# Altium PCB PCB2_brd2.PcbDoc
Units mil, origin at the board's own origin, x right, y up, seen from the top; angles counter-clockwise.
Board outline 3900 x 3900 mil, 2 copper layers (Top Layer, Bottom Layer); 48 components, 32 nets, 152 pads, 28 vias.
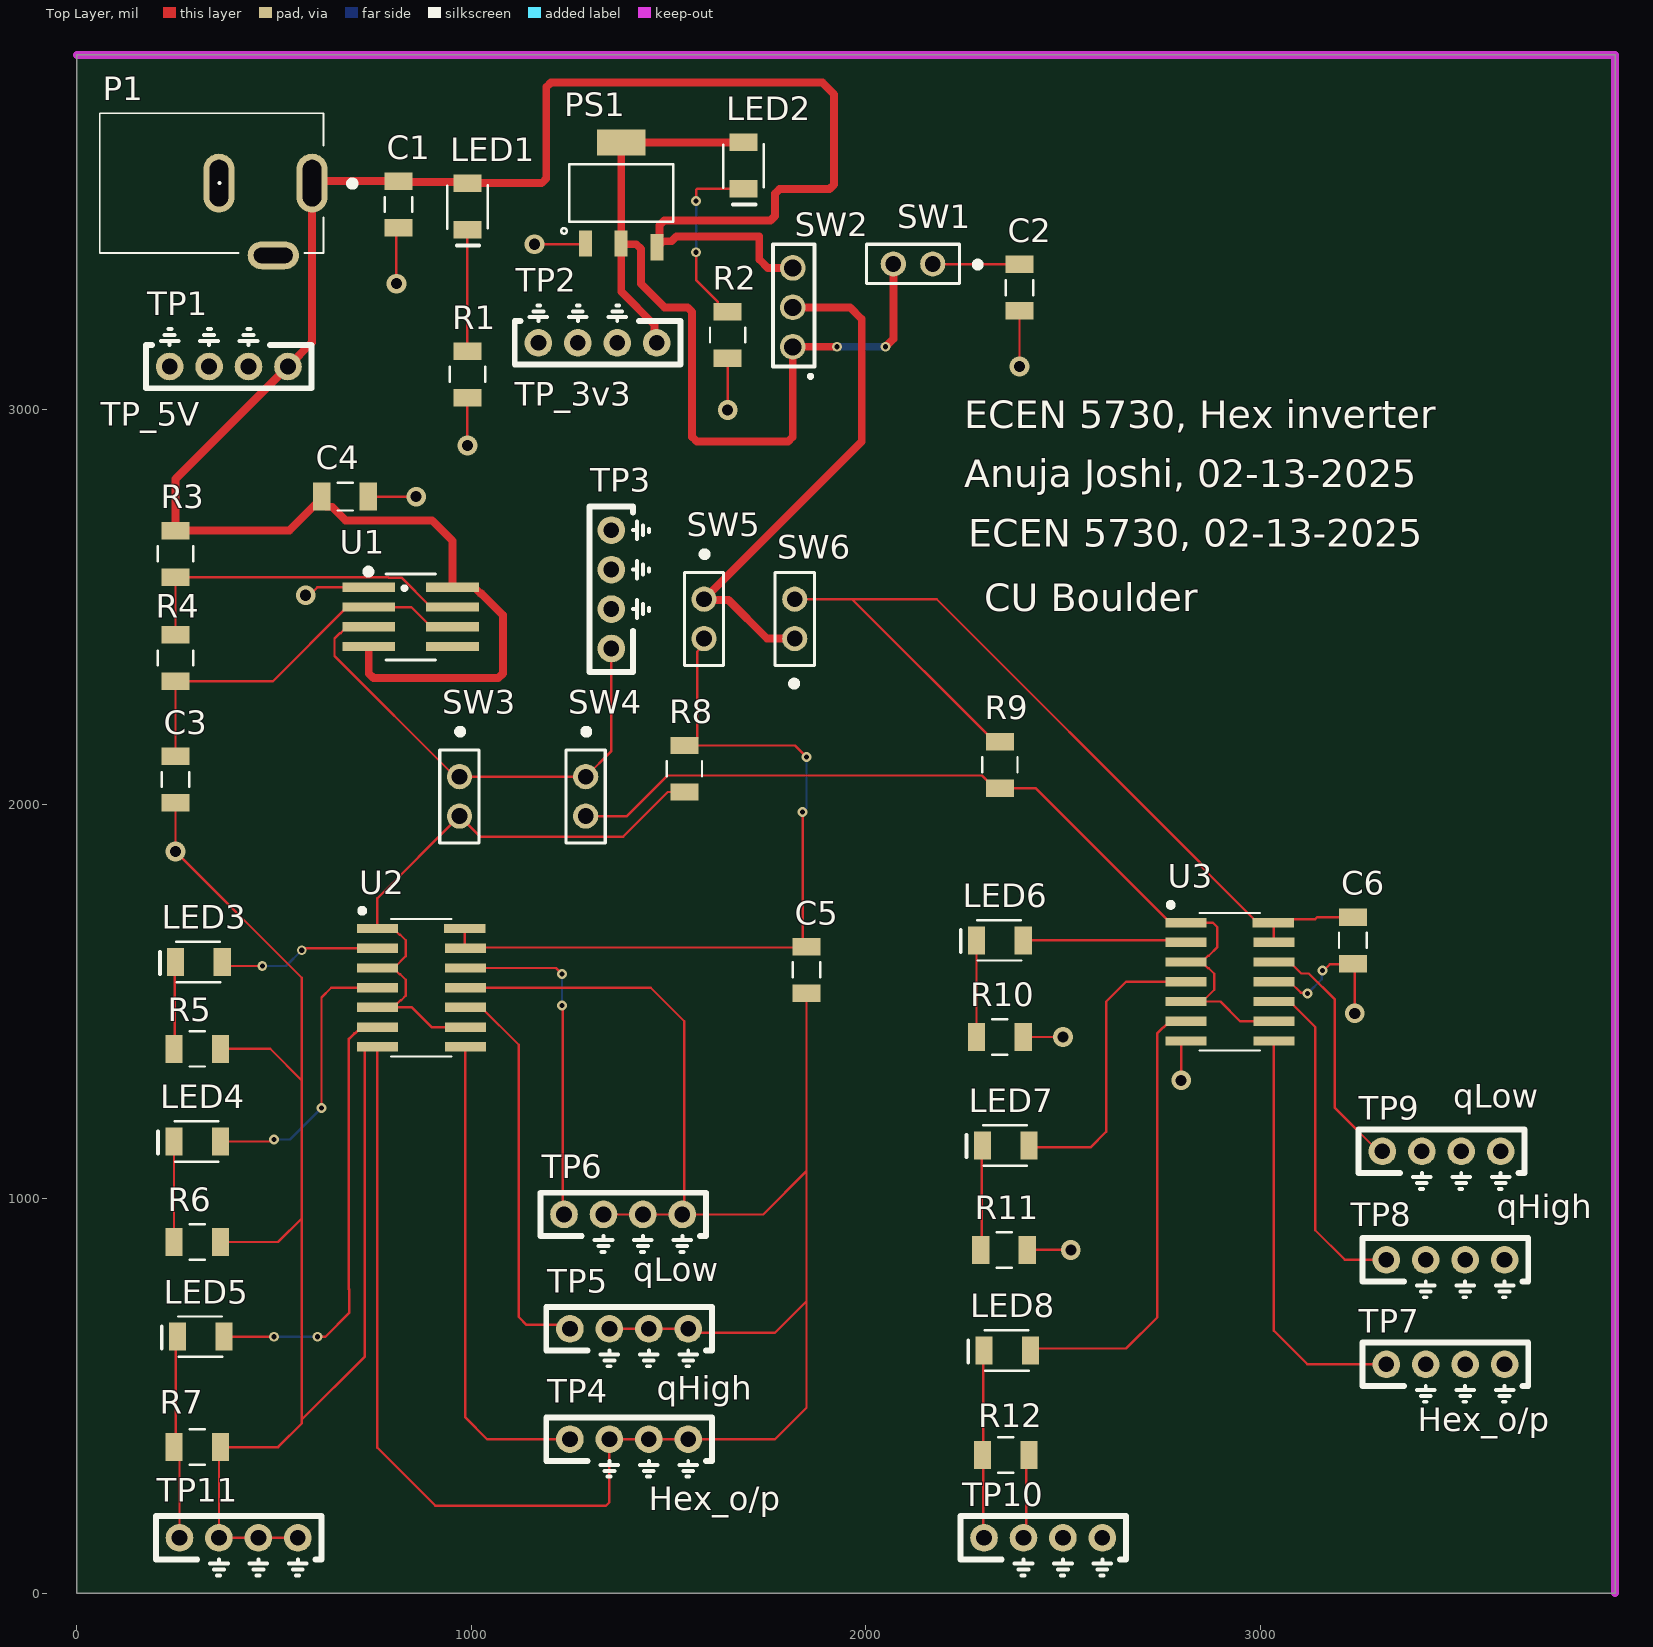
[diagram p0: Top Layer view]
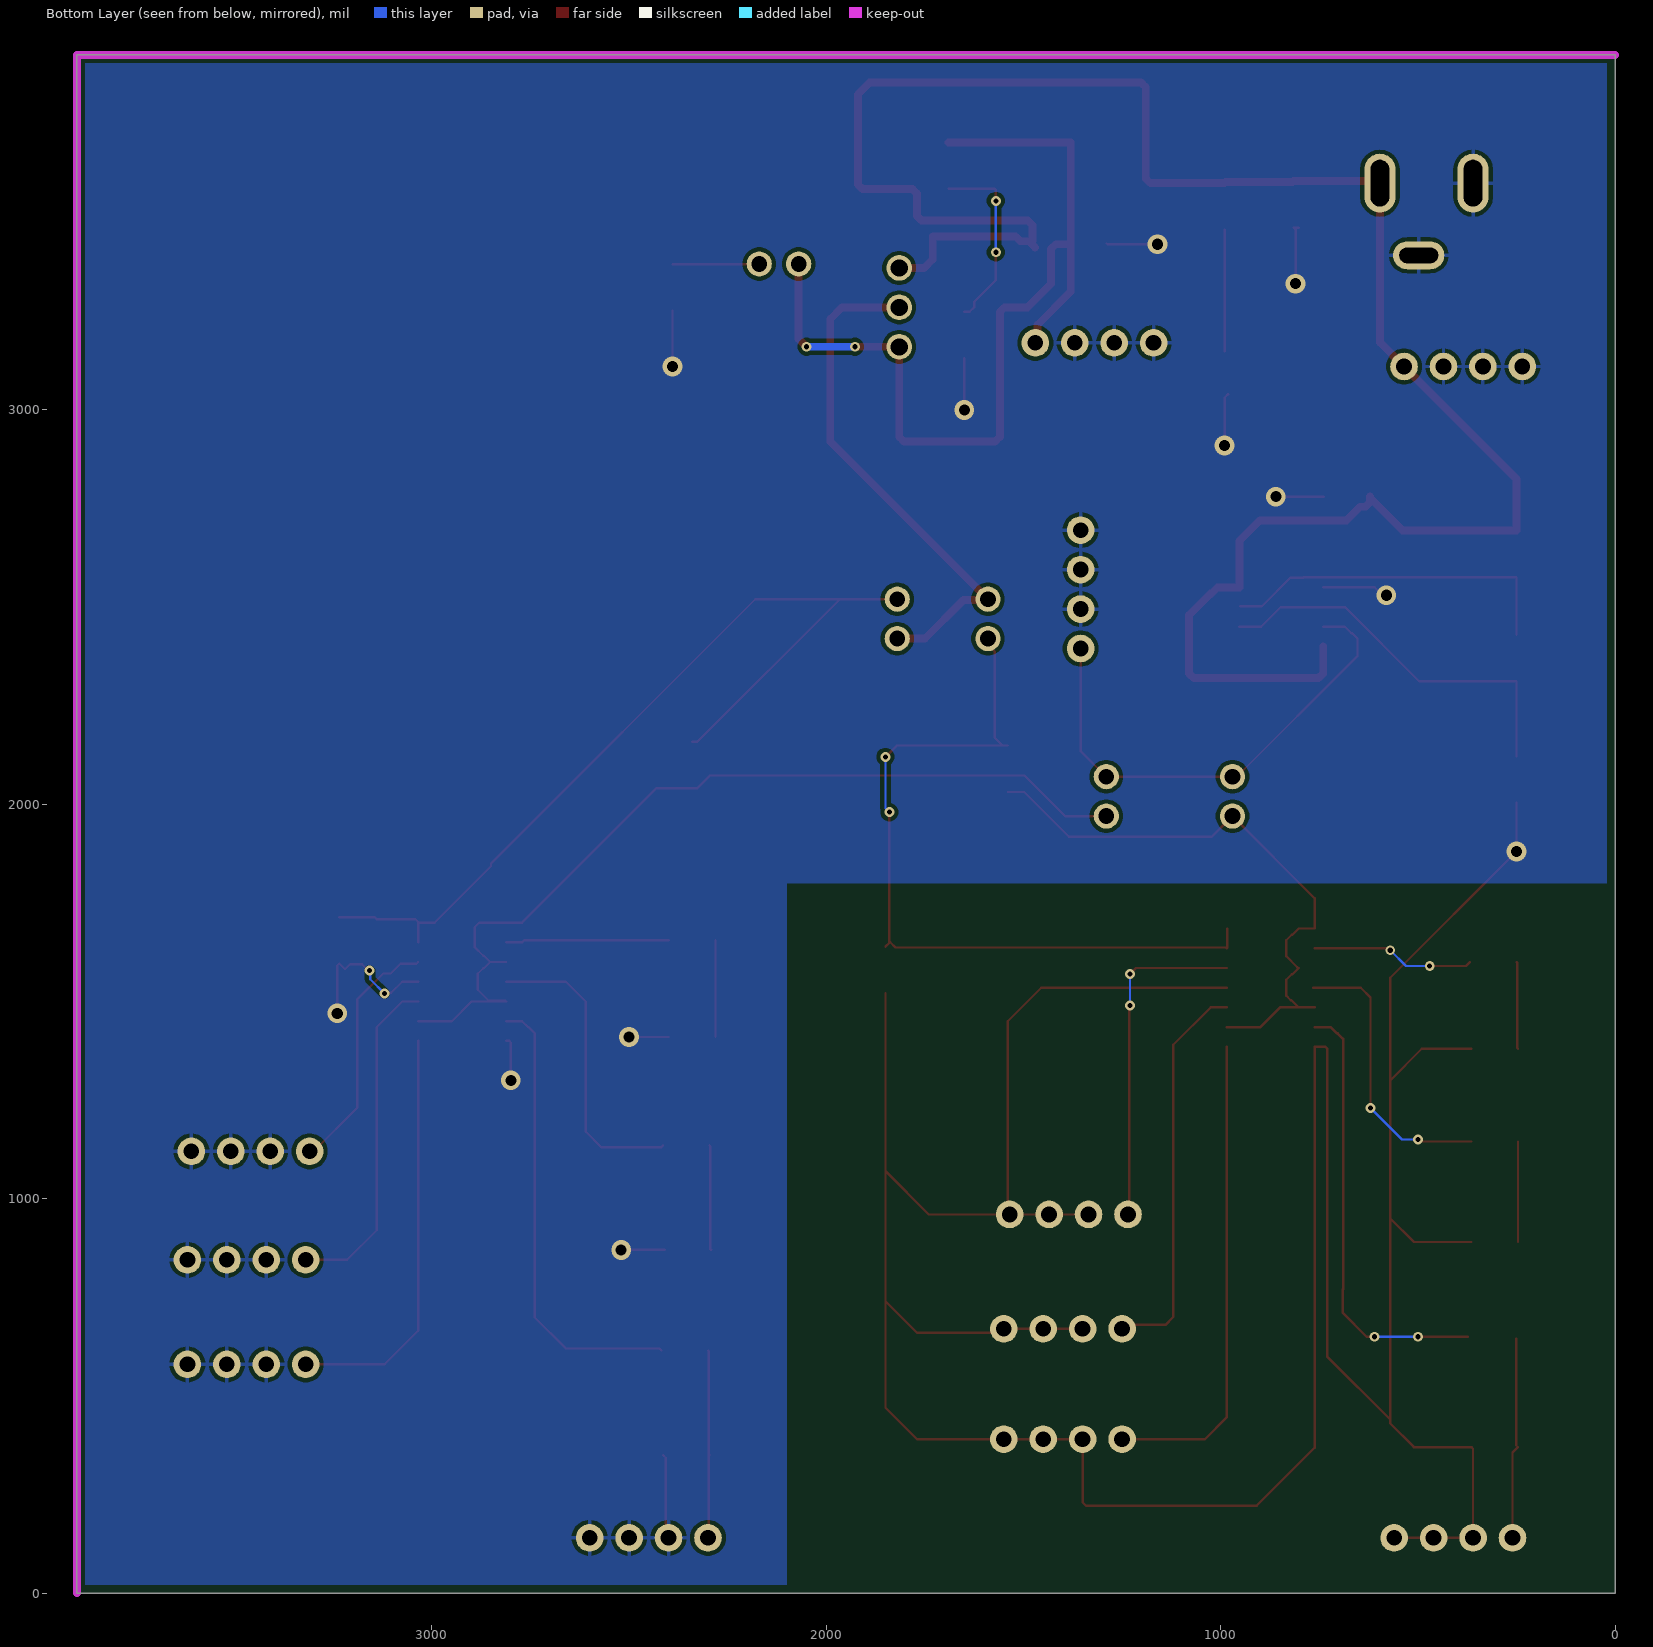
[diagram p1: Bottom Layer view, seen from below]
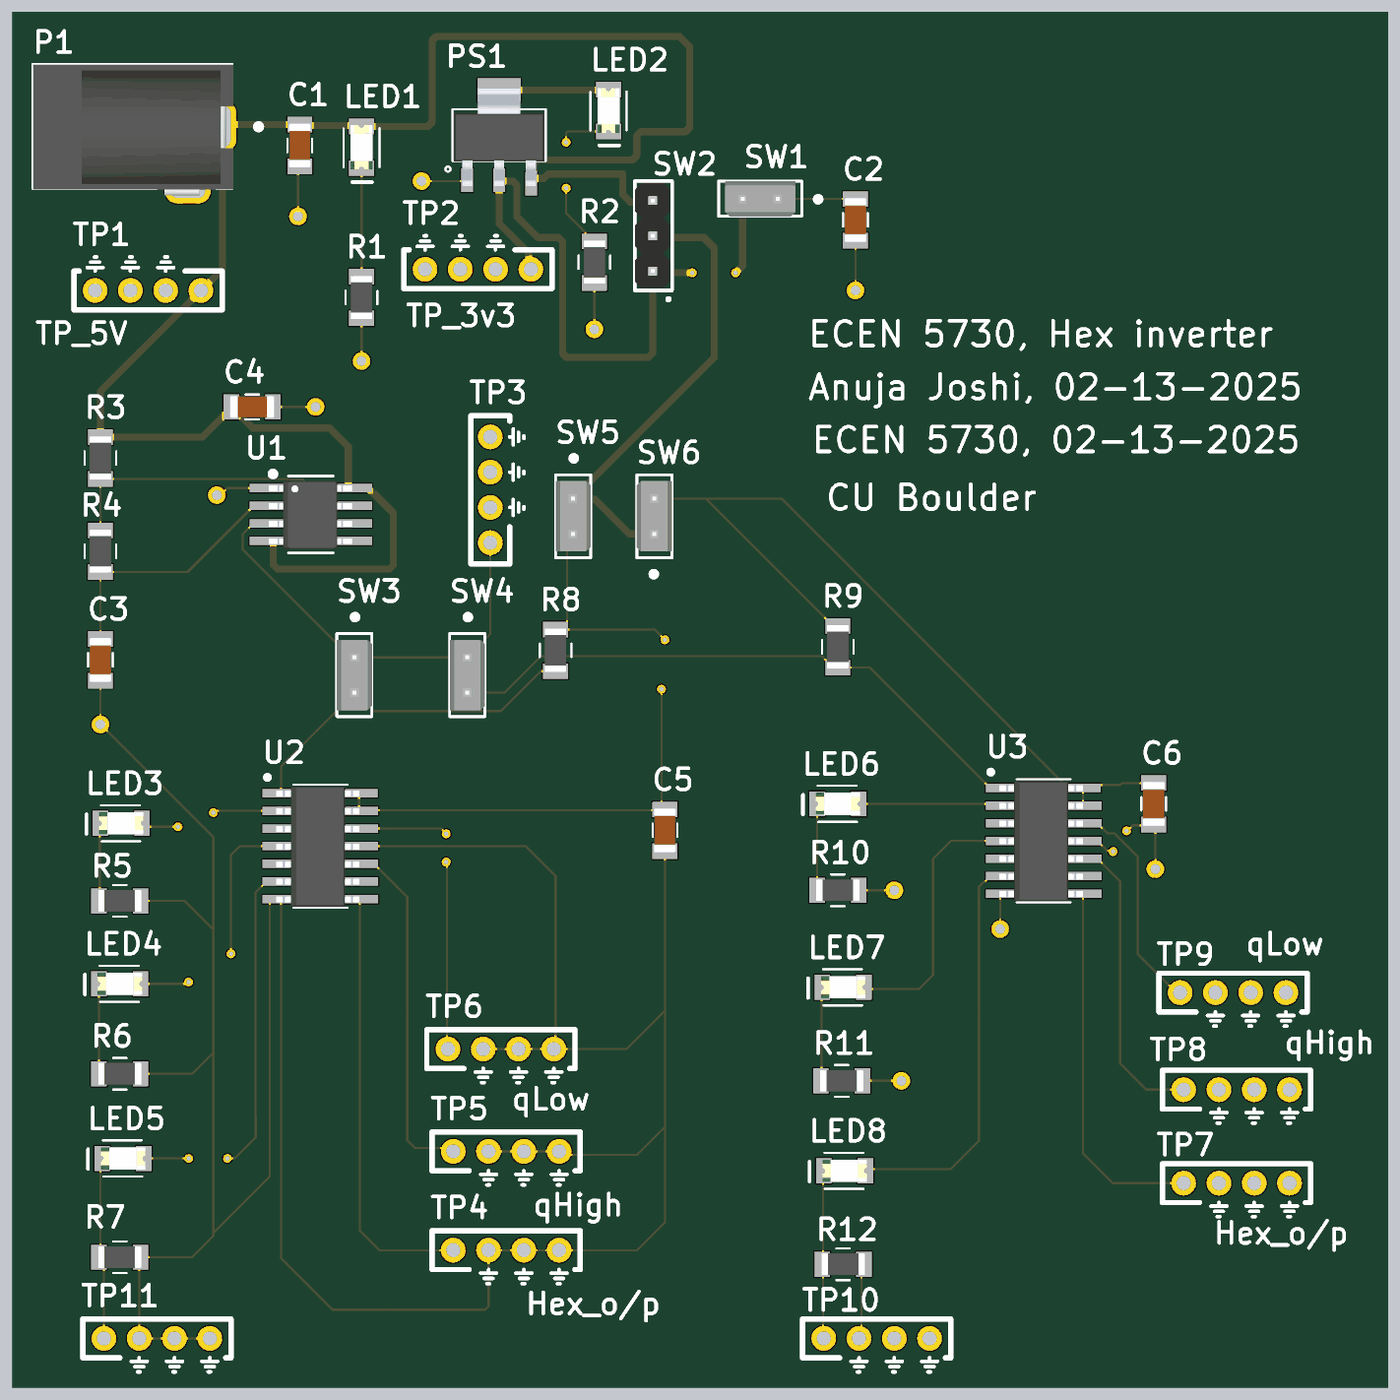
[diagram p2: 3D render of the assembled board from above, using the file's embedded part models]

## Layer stack, top to bottom
Top Solder: solder mask 0.4, Solder Resist, Dk 3.5
Top Layer: signal copper 1.4
Dielectric 1: dielectric 12.6, FR-4, Dk 4.8
Bottom Layer: signal copper 1.4
Bottom Solder: solder mask 0.4, Solder Resist, Dk 3.5

## Board outline
0,0 3900,0 3900,3900 0,3900

## Design rules (kind name [scope] priority, off if disabled: settings)
BoardOutlineClearance [All] p1: gap=10 ignorepadtopadclearanceinfootprint=FALSE except(0: Arc-SplitContinuation Track-SplitContinuation SMDPad-SplitContinuation THPad-SplitContinuation Via-SplitContinuation Fill-SplitContinuation Poly-SplitContinuation Region-SplitContinuation Text-SplitContinuation)
Clearance [All] p1: gap=10 ignorepadtopadclearanceinfootprint=FALSE
PlaneClearance [All] p1: clearance=10
PlaneConnect [All] p1: planeconnectstyle=Direct reliefexpansion=20 reliefentries=4 reliefconductorwidth=10 reliefairgap=10
PolygonConnect [All] p1: thpad.connectstyle=Relief thpad.reliefconductorwidth=10 thpad.reliefentries=4 thpad.polygonreliefangle="90 Angle" thpad.airgapwidth=10 smdpad.connectstyle=Direct smdpad.reliefconductorwidth=10 smdpad.reliefentries=4 smdpad.polygonreliefangle="90 Angle" smdpad.airgapwidth=10 via.connectstyle=Direct via.reliefconductorwidth=10 via.reliefentries=4 via.polygonreliefangle="90 Angle" via.airgapwidth=10
RoutingVias [All] p1: holewidth=13 width=25 viastyle="Through Hole" minholewidth=13 minwidth=25 maxholewidth=60 maxwidth=80
SolderMaskExpansion [All] p1: expansion=4 istentingtop=FALSE
SupplyNets "Schematic Supply Nets_1" [InNet('5V')] p1: voltage=0.000
SupplyNets "Schematic Supply Nets_3" [InNet('GND')] p2: voltage=0.000
SupplyNets "Schematic Supply Nets" [InNet('3.3V')] p3: voltage=0.000
UnRoutedNet [All] p1: checkbadconnections=TRUE
Width "Schematic Width Constraint_1" [InNet('3.3V')] p1: maxlimit=100 minlimit=20 preferedwidth=20 minimp=50.000000 maximp=50.000000 favimp=50.000000
Width "Schematic Width Constraint_4" [InNet('NetSW2_2')] p2: maxlimit=100 minlimit=20 preferedwidth=20 minimp=50.000000 maximp=50.000000 favimp=50.000000
Width "Schematic Width Constraint" [InNet('5V')] p3: maxlimit=100 minlimit=20 preferedwidth=20 minimp=50.000000 maximp=50.000000 favimp=50.000000
Width [All] p4: maxlimit=6 minlimit=6 preferedwidth=6 minimp=50.000000 maximp=50.000000 favimp=50.000000
27 further rules are at their usual default settings.

## Components (designator, comment, footprint, x,y, rotation, side; value= is the part's Value field where it differs from the comment)
C1 "22uF" 1206_Passive_Capacitor 815,3521 r90 top
C2 "22uF" 1206_Passive_Capacitor 2390,3310 r90 top
C3 "1uF" 1206_Passive_Capacitor 250,2063 r90 top
C4 "22uF" 1206_Passive_Capacitor 680,2780 r0 top
C5 "22uF" 1206_Passive_Capacitor 1850,1580 r270 top
C6 "22uF" 1206_Passive_Capacitor 3235,1655 r270 top
LED1 "Green" LED_1206 990,3516 r270 top
LED2 "Blue" LED_1206 1690,3620 r270 top
LED3 "Green" LED_1206 309,1600 r180 top
LED4 "Green" LED_1206 305,1145 r180 top
LED5 "Green" LED_1206 314,650 r180 top
LED6 "Green" LED_1206 2340,1655 r180 top
LED7 "Green" LED_1206 2355,1135 r180 top
LED8 "Green" LED_1206 2359,615 r180 top
P1 "Power Jack" Power_Jack 596.22,3575 r180 top value="CONN PWR JACK 2X5.5MM SOLDER"
PS1 "AMS1117-3.3" LDO 1380,3550 r0 top value="IC REG LINEAR 3.3V 800MA SOT223"
R1 "1k" 1206_Passive_Resitor 990,3090 r90 top value="1K Ohm"
R2 "1k" 1206_Passive_Resitor 1650,3190 r90 top value="1K Ohm"
R3 "1k" 1206_Passive_Resitor 250,2635 r90 top value="1K Ohm"
R4 "1k" 1206_Passive_Resitor 250,2371 r90 top value="1K Ohm"
R5 "47 Ohms" 1206_Passive_Resitor 305,1380 r0 top value=47Ohm
R6 "47 Ohms" 1206_Passive_Resitor 305,890 r0 top value=47Ohm
R7 "47 Ohms" 1206_Passive_Resitor 305,370 r0 top value=47Ohm
R8 "10k" 1206_Passive_Resitor 1540,2090 r90 top value=10KOhm
R9 "10k" 1206_Passive_Resitor 2340,2100 r90 top value=10KOhm
R10 "47 Ohms" 1206_Passive_Resitor 2340,1410 r0 top value=47Ohm
R11 "47 Ohms" 1206_Passive_Resitor 2351,870 r0 top value=47Ohm
R12 "47 Ohms" 1206_Passive_Resitor 2355,350 r0 top value=47Ohm
SW1 "SW_2Pin_100mil_Switch" 2Pin-Header-Conn 2170,3370 r180 top
SW2 "PREC003SAAN-RC" 3_PIN_100mil 1815,3160 r90 top value="CONN HEADER VERT 3POS 2.54MM"
SW3 "SW_2Pin_100mil_Switch" 2Pin-Header-Conn 970,2070 r270 top
SW4 "SW_2Pin_100mil_Switch" 2Pin-Header-Conn 1290,2070 r270 top
SW5 "SW_2Pin_100mil_Switch" 2Pin-Header-Conn 1590,2520 r270 top
SW6 "SW_2Pin_100mil_Switch" 2Pin-Header-Conn 1820,2420 r90 top
TP1 "TP_5V" TP10x_Probe 385,3110 r180 top
TP2 "10x Probe TP" TP10x_Probe 1320,3170 r180 top
TP3 "10x Probe TP" TP10x_Probe 1355,2545 r90 top
TP4 "10x Probe TP" TP10x_Probe 1400,390 r0 top
TP5 "10x Probe TP" TP10x_Probe 1400,670 r0 top
TP6 "10x Probe TP" TP10x_Probe 1385,960 r0 top
TP7 "10x Probe TP" TP10x_Probe 3470,580 r0 top
TP8 "10x Probe TP" TP10x_Probe 3470,845 r0 top
TP9 "10x Probe TP" TP10x_Probe 3460,1120 r0 top
TP10 "10x Probe TP" TP10x_Probe 2450,140 r0 top
TP11 "10x Probe TP" TP10x_Probe 410,140 r0 top
U1 "LMC555CMX/NOPB" TS555IDTTR 846.3,2475 r0 top
U2 "SN74AHC14DR" HEX_74AC14 873.35,1535 r0 top
U3 "SN74AHC14DR" HEX_74AC14 2923.35,1550 r0 top

## Footprints (in the part's own frame and the unit in brackets; to place one, negate y for a bottom-side part, rotate by r counter-clockwise, add the part's x,y. Pads: shape width x height; smd on the part's side, far side on the other; paste and mask are expansions set on the pad)
2Pin-Header-Conn [mm]
  round 1.62 hole 1.02: 1(0,0) 2(2.54,0)
  silkscreen extent -3.03,-1.27 4.26,1.26, body extent -1.27,-1.27 3.81,1.27, height 8.13
3_PIN_100mil [mm]
  round 1.65 hole 1.1: 1(0,0) 2(2.54,0) 3(5.08,0)
  silkscreen extent -2,-1.4 6.6,1.27, body extent -1.14,-1.27 6.48,1.27, height 8.38
1206_Passive_Capacitor [mil]
  rect 44x71 smd: 1(-59,0) 2(59,0)
  silkscreen extent -19,-35 19,35, body extent -63,-31 63,32, height 50
1206_Passive_Resitor [mil]
  rect 44x71 smd: 1(-59,0) 2(59,0)
  silkscreen extent -19,-45 19,45, body extent -61,-31 61,31, height 26
HEX_74AC14 [mm]
  rect 2.65x0.6 smd: 1(-2.836,3.81) 2(-2.836,2.54) 3(-2.836,1.27) 4(-2.836,0) 5(-2.836,-1.27) 6(-2.836,-2.54) 7(-2.836,-3.81) 8(2.836,-3.81) 9(2.836,-2.54) 10(2.836,-1.27) 11(2.836,0) 12(2.836,1.27) 13(2.836,2.54) 14(2.794,3.81)
  silkscreen extent -3.94,-4.43 1.95,5.08, body extent -3.18,-4.35 2.82,4.3, height 1.75
LDO [mm]
  rect 0.838x1.7 smd: 1(-2.311,-3.25) 2(0,-3.25) 3(2.311,-3.5)
  rect 3.099x1.7 smd: 4(0,3.25)
  silkscreen extent -3.86,-2.62 3.35,1.85, body extent -3.25,-3.65 3.25,3.35, height 1.85
LED_1206 [mil]
  rect 44x71 smd: 1(-59,0) 2(59,0)
  silkscreen extent -54,-51 99,51, body extent -63,-31 63,31, height 28
Power_Jack [mm]
  oval 2x3.8 hole 1.2 slot 3 at 90 deg: 1(0,0) 2(6,0)
  oval 3.3x1.8 hole 1 slot 2.5 at 0 deg: 3(2.5,4.65)
  silkscreen extent -2.79,-4.5 13.68,4.5, body extent -0.76,-4.45 13.64,4.95, height 11.49
TP10x_Probe [mil] "Small Probs footprint"
  round 70 hole 40: 1(-150,0) 2(-50,0) 2(50,0) 2(150,0)
  silkscreen extent -210,-95 210,55
TS555IDTTR [mm] "IC OSC Single Timer 2.7MHz 8SOIC"
  rect 3.4x0.6 smd: 1(-2.7,1.905) 2(-2.7,0.635) 3(-2.7,-0.635) 4(-2.7,-1.905) 5(2.7,-1.905) 6(2.7,-0.635) 7(2.7,0.635) 8(2.7,1.905)
  silkscreen extent -2.85,-2.77 1.6,3.05, body extent -3.03,-2.48 2.96,2.43, height 1.75

## Part data
C1 C2 C4 C5 C6: library part C_22uF_1206, "22uF ±10% 25V X5R 1206 Multilayer Ceramic Capacitors MLCC - SMD/SMT RoHS", LCSC Part#=C12891, MFR Part #=CL31A226KAHNNNE, Datasheet=https://datasheet.lcsc.com/lcsc/1811031514_Samsung-Electro-Mechanics-CL31A226KAHNNNE_C12891.pdf, Type=basic
C3: library part C_1uF_1206, "MULTILAYER CERAMIC CAPACITORS MLCC - SMD/SMT 1UF 50V 1206 ROHS", LCSC Part#=C1848, MFR Part #=CL31B105KBHNNNE, Digikey Link=https://www.digikey.com/product-detail/en/C1206C105M4RACTU/399-8150-1-ND/3471873/?itemSeq=304982366, Type=Basic
LED1 LED3 LED4 LED5 LED6 LED7 LED8: library part LED_GREEN_1206, "Green 513~528nm 1206 Light Emitting Diodes (LED) RoHS", LCSC Part#=C434439, MFR Part #=SZYY1206G, Datasheet=https://datasheet.lcsc.com/lcsc/2006301532_Yongyu-Photoelectric-SZYY1206G_C434439.pdf, Type=Extended
LED2: library part LED_BLUE_1206, "blue 1206  Light Emitting Diodes (LED) ROHS", LCSC Part#=C130717, MFR Part #=NCD1206B1, Datasheet=https://datasheet.lcsc.com/lcsc/2008201033_Foshan-NationStar-Optoelectronics-NCD1206B1_C130717.pdf, Type=Extended
P1: library part "P_Power Jack", "Power Barrel Connector Jack 2.10mm ID (0.083\"), 5.50mm OD (0.217\") Through Hole, Right Angle", LCSC Part#=C136744, MFR Part #=PJ-102A, Digikey Link=https://www.digikey.com/product-detail/en/PJ-102A/CP-102A-ND/275425/?itemSeq=304982367, Type=Extended
PS1: library part PS_AMS_LDO_3v3, "LOW DROPOUT REGULATORS(LDO) POSITIVE FIXED 1.3V @ 800MA 15V 3.3V 1A SOT-223 ROHS", LCSC Part#=C6186, MFR Part #=AMS1117-3.3, Type=Basic
R1 R2 R3 R4: library part R_1K_1206, "CHIP RESISTOR - SURFACE MOUNT 1KOHMS ±1% 1/4W 1206 ROHS", LCSC Part#=C4410, MFR Part #=RNCP1206FTD1K00CT, Digikey Link=https://www.digikey.com/product-detail/en/RNCP1206FTD1K00/RNCP1206FTD1K00CT-ND/2240675/?itemSeq=304982373, Type=Basic
R5 R6 R7 R10 R11 R12: library part R_47Ohm_1206, "47Ω ±5% 0.25W ±200ppm/℃ 1206 Chip Resistor - Surface Mount RoHS", LCSC Part#=C25384, MFR Part #=1206W4J0470T5E, Datasheet=https://datasheet.lcsc.com/lcsc/1811101020_UNI-ROYAL-Uniroyal-Elec-1206W4J0470T5E_C25384.pdf, Type=Extended
R8 R9: library part R_10KOhm_1206, "10 kOhms ±5% 0.25W, 1/4W Chip Resistor 1206 (3216 Metric) Automotive AEC-Q200 Thick Film", LCSC Part#=C17902, MFR Part #=RMCF1206FT10K0, Digikey Link=https://www.digikey.com/en/products/detail/stackpole-electronics-inc/RMCF1206FT10K0/1759669, Type=Basic
SW1 SW3 SW4 SW5 SW6: "2Pin Header", LCSC Part#=C124375, Type=Extended
SW2: library part SW_3Pin_100mil_Switch, "Connector Header Through Hole 3 position 0.100\" (2.54mm)", LCSC Part#=C49257, Digikey Link=https://www.digikey.com/product-detail/en/PREC003SAAN-RC/S1012EC-03-ND/2774851/?itemSeq=304982371, MFR Part #=PREC003SAAN-RC, Type=Extended
TP1 TP2 TP3 TP4 TP5 TP6 TP7 TP8 TP9 TP10 TP11: library part TP_10x_Probe, "Test Point 300 mil centers"
U1: library part U_555_Fast, "555 Type, Timer/Oscillator _Single_ IC 3MHz 8-SO", LCSC Part#=C90760, Package=SOIC-8, Digikey Link=https://www.digikey.com/product-detail/en/texas-instruments/LMC555CMX-NOPB/LMC555CMX-NOPBCT-ND/1010550, MFR Part #=LMC555CMX/NOPB, Type=Extended
U2 U3: library part U_74AHC14, "Inverter IC 6 Channel Schmitt Trigger 14-SOIC", LCSC Part#=C6942, Datasheet=https://datasheet.lcsc.com/szlcsc/ON-Semicon-ON-74AC14SCX_C5482.pdf, MFR Part #=SN74AHC14DR, Type=Extended

## Via types
v1: diameter 25, hole 13, Top Layer to Bottom Layer, 16 vias
v2: diameter 50, hole 28, Top Layer to Bottom Layer, 12 vias

## Nets (pads, with @x,y where several pads share a name; then routed paths per layer and width w, separated by ;. In a path a pad name is that pad's centre, name@x,y a point inside that pad or via, vN(x,y) a via of type N, cw(c..) or ccw(c..) an arc to the next point about the centre after c; other vN are vias at no path point)
3.3V: LED2.1 PS1.2 PS1.4 SW1.2 SW2.1 TP2.1 | length 2411.8
  Top Layer w20: TP2.1 1464.04,3175.96 1464.04,3215.96 1380,3300 PS1.2 ; LED2.1@1690,3677.95 PS1.4 PS1.2 ; v1(1927.5,3160) SW2.1 1815,2931.72 1803.28,2920 1571.72,2920 1560,2931.72 1560,3248.28 1548.28,3260 1490,3260 1430,3320 1430,3408.28 1418.28,3420 1382.05,3420 PS1.2 ; v1(2050,3160) 2070,3180 SW1.2@2070,3360
  Bottom Layer w20: v1(1927.5,3160) v1(2050,3160)
5V: C1.2 C4.1 LED1.1 P1.1 PS1.3 R3.2 SW2.3 TP1.1 U1.4 U1.8 | length 5459.9
  Top Layer w20: C4.1 C4.1@621,2776.5 ; U1.4 740,2331.72 751.72,2320 1068.28,2320 1080,2331.72 1080,2479.62 1025.58,2534.05 1023.67,2534.05 1007.72,2550 U1.8 952.6,2667.4 900,2720 681,2720 646.5,2754.5 633,2754.5 621,2766.5 C4.1@621,2776.5 ; PS1.3 1486.31,3427.52 1507.52,3427.52 1520,3440 1730,3440 1730,3381.72 1751.72,3360 SW2.3 SW2.3@1806.4,3368.6 ; PS1.3@1477.31,3427.52 1477.31,3468.28 1489.03,3480 1758.28,3480 1770,3491.72 1770,3548.28 1781.72,3560 1908.28,3560 1920,3571.72 1920,3800 1899.97,3820.03 1890,3830 1201.72,3830 1190,3818.28 1190,3586.72 1178.28,3575 LED1.1 987.5,3577.5 817.5,3577.5 C1.2 601.22,3580 P1.1 596.22,3171.22 TP1.1 250,2825 R3.2 538.5,2694 C4.1@621,2776.5
GND: C1.1 C2.1 C3.1 C4.2 C5.2 C6.2 P1.2 P1.3 PS1.1 R1.1 R2.1 R5.2 R6.2 R7.2 R10.2 R11.2 R12.2 TP1.2 TP2.2 TP3.2 TP4.2 TP5.2 TP6.2 TP7.2 TP8.2 TP9.2 TP10.2 TP11.2 U1.1 U2.7 U2.11 U3.7 U3.11 | length 11391
  Top Layer w6: C3.1 v2(250,1880) 570,1560 570,1300 ; R6.2 510,890 570,950 ; R5.2 490,1380 570,1300 ; TP11.2@560,140 460,140 360,140 360,366 R7.2 510,370 570,430 570,440 ; v2(580,2530) 589.47,2530 609.47,2550 U1.1 ; C4.2 v2(860,2780) ; C1.1@801.5,3462 C1.1 810,3457 v2(810,3320) ; R1.1@981,3040 R1.1 v2(990,2910) ; U2.11 1455,1535 1540,1450 TP6.2@1540,960 ; v2(1160,3420) 1286.95,3420 PS1.1 ; TP6.2@1335,960 1435,960 1535,960 1540,955 TP6.2@1540,960 ; TP5.2@1350,670 1450,670 1550,670 1560,660 1770,660 1850,740 ; v2(1650,3000) R2.1 ; C5.2 1850,1070 ; v2(2390,3110) C2.1 ; R10.2 v2(2500,1410) ; TP10.2@2400,140 2407,147 2407,343 R12.2 ; R11.2 v2(2520,870) ; v2(2800,1300) 2800,1395.69 2804.31,1400 U3.7 ; U3.11 3075.35,1550 3103.44,1521.91 3118.09,1521.91 v1(3120,1520) ; v1(3158.38,1578.38) 3161.08,1578.38 3177,1594.29 3207.71,1594.29 3220.5,1581.5 C6.2 3240,1591 v2(3240,1470) ; 570,440 570,950 ; 570,440 730,600 730,1380.69 734.31,1385 U2.7 761.69,368.31 908.79,221.21 1341.21,221.21 1350,230 1350,390 1450,390 1550,390 1770,390 1850,470 1850,740 ; 570,950 570,1300 ; TP6.2@1540,960 1740,960 1850,1070 ; 1850,740 1850,1070
  Bottom Layer w6: v1(3120,1520) 3156.46,1556.46 3156.46,1576.46 v1(3158.38,1578.38)
NetC2_2: C2.2 SW1.1 | length 219
  Top Layer w6: SW1.1@2170.5,3369.5 C2.2@2389.5,3369.5
NetC3_2: C3.2 R4.1 U1.2 U1.6 | length 991.2
  Top Layer w6: C3.2 R4.1 496.88,2312 684.88,2500 U1.2 847.48,2500 897.48,2450 U1.6
NetC5_1: C5.1 R8.2 SW5.2 U2.13 U2.14 | length 2007.4
  Top Layer w6: U2.14 983.35,1636.65 U2.13 986.81,1636.81 1824.5,1636.81 C5.1@1838,1650.31 ; R8.2 R8.2@1553.5,2149 ; SW5.2 1590,2404.36 1572.5,2386.86 1572.5,2168 R8.2@1553.5,2149 ; v1(1840,1980) 1840,1649 C5.1 ; v1(1850,2120) 1821,2149 R8.2@1553.5,2149
  Bottom Layer w6: v1(1840,1980) 1850,1990 v1(1850,2120)
NetC6_1: C6.1 R9.2 SW6.2 U3.13 U3.14 | length 2339.3
  Top Layer w6: SW6.2 1965.5,2520 ; R9.2 2326.5,2159 1965.5,2520 ; U3.13 3035,1698.35 U3.14 ; C6.1 3145.1,1714 3139.91,1708.81 3042.16,1708.81 U3.14 ; 1965.5,2520 2180,2520 2850,1850 2850,1842.99 2992.99,1700 U3.14
NetLED1_2: LED1.2 R1.2 | length 308
  Top Layer w6: R1.2 LED1.2
NetLED2_2: LED2.2 R2.2 | length 471
  Top Layer w6: v1(1570,3399.7) 1570,3329 1624.5,3274.5 1624.5,3261 1636.5,3249 R2.2 ; v1(1570,3530) 1570,3557.49 1573.51,3561 LED2.2
  Bottom Layer w6: v1(1570,3399.7) v1(1570,3530)
NetLED3_1: LED3.1 U2.2 | length 416.5
  Top Layer w6: LED3.1 378,1590 v1(470,1590) ; v1(570,1630) 575,1635 U2.2
  Bottom Layer w6: v1(470,1590) 530,1590 v1(570,1630)
NetLED3_2: LED3.2 R5.1 | length 221.7
  Top Layer w6: R5.1 248,1382 248,1598 LED3.2
NetLED4_1: LED4.1 U2.4 | length 726.6
  Top Layer w6: LED4.1 493.65,1145 498.65,1150 v1(500,1150) ; v1(620,1230) 620,1510 645,1535 U2.4 U2.4@765,1535
  Bottom Layer w6: v1(500,1150) 540,1150 v1(620,1230)
NetLED4_2: LED4.2 R6.1 | length 255
  Top Layer w6: R6.1 LED4.2
NetLED5_1: LED5.1 U2.6 | length 1121.7
  Top Layer w6: LED5.1 v1(500,650) ; v1(610,650) 630,650 690,710 690,770 689.53,770.47 689.53,1405.1 703.48,1419.05 705.39,1419.05 721.34,1435 U2.6
  Bottom Layer w6: v1(500,650) v1(610,650)
NetLED5_2: LED5.2 R7.1 TP11.1 | length 506.8
  Top Layer w6: R7.1 260,356 TP11.1 ; R7.1@250.5,374.5 LED5.2@250.5,645.5
NetLED6_1: LED6.1 U3.2 | length 414.8
  Top Layer w6: LED6.1 2766.34,1655 2771.34,1650 U3.2
NetLED6_2: LED6.2 R10.1 | length 245
  Top Layer w6: R10.1 LED6.2
NetLED7_1: LED7.1 U3.4 | length 767
  Top Layer w6: LED7.1 2419,1130 2570,1130 2610,1170 2610,1500 2660,1550 U3.4
NetLED7_2: LED7.2 R11.1 | length 266.7
  Top Layer w6: R11.1 2294,872 2294,1133 LED7.2
NetLED8_1: LED8.1 U3.6 | length 1161.7
  Top Layer w6: LED8.1 2423,620 2660,620 2739.53,699.53 2739.53,1420.1 2753.48,1434.05 2755.39,1434.05 2771.34,1450 U3.6
NetLED8_2: LED8.2 R12.1 TP10.1 | length 479.1
  Top Layer w6: TP10.1@2298,150 2298,348 R12.1 2298,352 2298,613 LED8.2 ; TP10.1 2298,142 2300,144 TP10.1@2300,150
NetR3_1: R3.1 R4.2 U1.7 | length 877.5
  Top Layer w6: R4.2 R3.1 788.81,2576 790,2574.81 822.67,2574.81 895.67,2501.81 U1.7@950.79,2501.81
NetR8_1: R8.1 SW3.2 U2.1 U2.3 U2.5 U2.9 | length 1546.6
  Top Layer w6: U2.5 U2.5@802.05,1485 ; U2.3@802.05,1585 818,1569.05 819.91,1569.05 833.86,1555.1 833.86,1514.9 822.14,1503.19 820.24,1503.19 U2.5@802.05,1485 ; U2.3@805.76,1586.81 833.86,1614.9 833.86,1655.1 819.91,1669.05 818,1669.05 802.05,1685 U2.1 761.69,1761.69 SW3.2 1021.89,1918.11 1385.06,1918.11 1497.95,2031 R8.1 ; U2.9 899.25,1435 849.25,1485 U2.5@802.05,1485
NetR9_1: R9.1 SW4.2 U3.1 U3.3 U3.5 U3.9 | length 2362.9
  Top Layer w6: SW4.2 1394.52,1970 1497.52,2073 2294.5,2073 2326.5,2041 R9.1 2430.34,2041 2771.34,1700 U3.1 2880,1700 2891.72,1688.28 2891.72,1637.76 2869.91,1615.95 2868,1615.95 U3.3@2852.05,1600 ; U3.3 U3.3@2852.05,1600 ; U3.9 2949.25,1450 2899.25,1500 U3.5 2813.5,1501.81 2855.76,1501.81 2883.86,1529.9 2883.86,1570.1 2869.91,1584.05 2868,1584.05 U3.3@2852.05,1600
NetSW2_2: SW2.2 SW5.1 SW6.1 | length 1334.5
  Top Layer w20: SW2.2 1960,3260 1990,3230 1990,2920 SW5.1 1591.89,2518.11 1651.89,2518.11 1750,2420 SW6.1
NetSW3_1: SW3.1 SW4.1 TP3.1 U1.3 | length 1258.9
  Top Layer w6: U1.3 684.88,2450 668.93,2434.05 667.02,2434.05 653.07,2420.1 653.07,2376.22 959.29,2070 SW3.1 SW4.1 1355,2135 TP3.1
NetTP4_1: TP4.1 U2.8 | length 1227.8
  Top Layer w6: U2.8 985,445 1040,390 TP4.1
NetTP5_1: TP5.1 U2.10 | length 1007
  Top Layer w6: U2.10 1025.35,1485 1120,1390.35 1120,700 1140,680 1240,680 TP5.1
NetTP6_1: TP6.1 U2.12 | length 863.3
  Top Layer w6: U2.12 1215,1585 v1(1230,1570) ; v1(1230,1490) 1231.91,1488.09 1231.91,963.09 TP6.1
  Bottom Layer w6: v1(1230,1490) v1(1230,1570)
NetTP7_1: TP7.1 U3.8 | length 1055.2
  Top Layer w6: U3.8 3035,665 3120,580 TP7.1
NetTP8_1: TP8.1 U3.10 | length 858.2
  Top Layer w6: U3.10 3075.35,1500 3140,1435.35 3140,920 3215,845 TP8.1
NetTP9_1: TP9.1 U3.12 | length 634.8
  Top Layer w6: U3.12 3039.31,1595.69 3079.67,1595.69 3104.4,1570.95 3123.38,1570.95 3189.57,1504.76 3189.57,1230 3299.57,1120 TP9.1
pads on no net: U1.5

## Polygon pours and split planes (outlines as drawn)
GND on Bottom Layer "GND_L02_P004" (solid, pour order 4): 0,3910 3900,3910 3900,10 0,10

## Keep-outs
Keep-Out Layer:
  the board outline again, w20

## Other copper
Bottom Layer:
  pour cut-out: 0,1800 2100,1800 2100,0 0,0

## Silkscreen, mask and mechanical layers (free items; w line width, h text height)
Top Overlay:
  text "TP_3v3" at 1110,3010 h60
  text "TP_5V" at 60,2960 h60
  text "ECEN 5730, Hex inverter" at 2250,2953.33 h70
  text "Anuja Joshi, 02-13-2025" at 2250,2803.33 h70
  text "ECEN 5730, 02-13-2025" at 2260,2653.33 h70
  text "CU Boulder" at 2300,2490 h70
  text "qLow" at 3490,1229.99 h60
  text "qHigh" at 3600,949.99 h60
  text "qLow" at 1410,789.99 h60
  text "qHigh" at 1470,489.99 h60
  text "Hex_o/p" at 3400,409.99 h60
  text "Hex_o/p" at 1450,209.99 h60